# Altium PCB Jelly_Fish.PcbDoc
Units mil, origin at the board's own origin, x right, y up, seen from the top; angles counter-clockwise.
Board outline 1695 x 2770 mil, 2 copper layers (Top Layer, Bottom Layer); 18 components, 19 nets, 90 pads, 6 vias.
Unrouted connection lines stored in the file: 1.
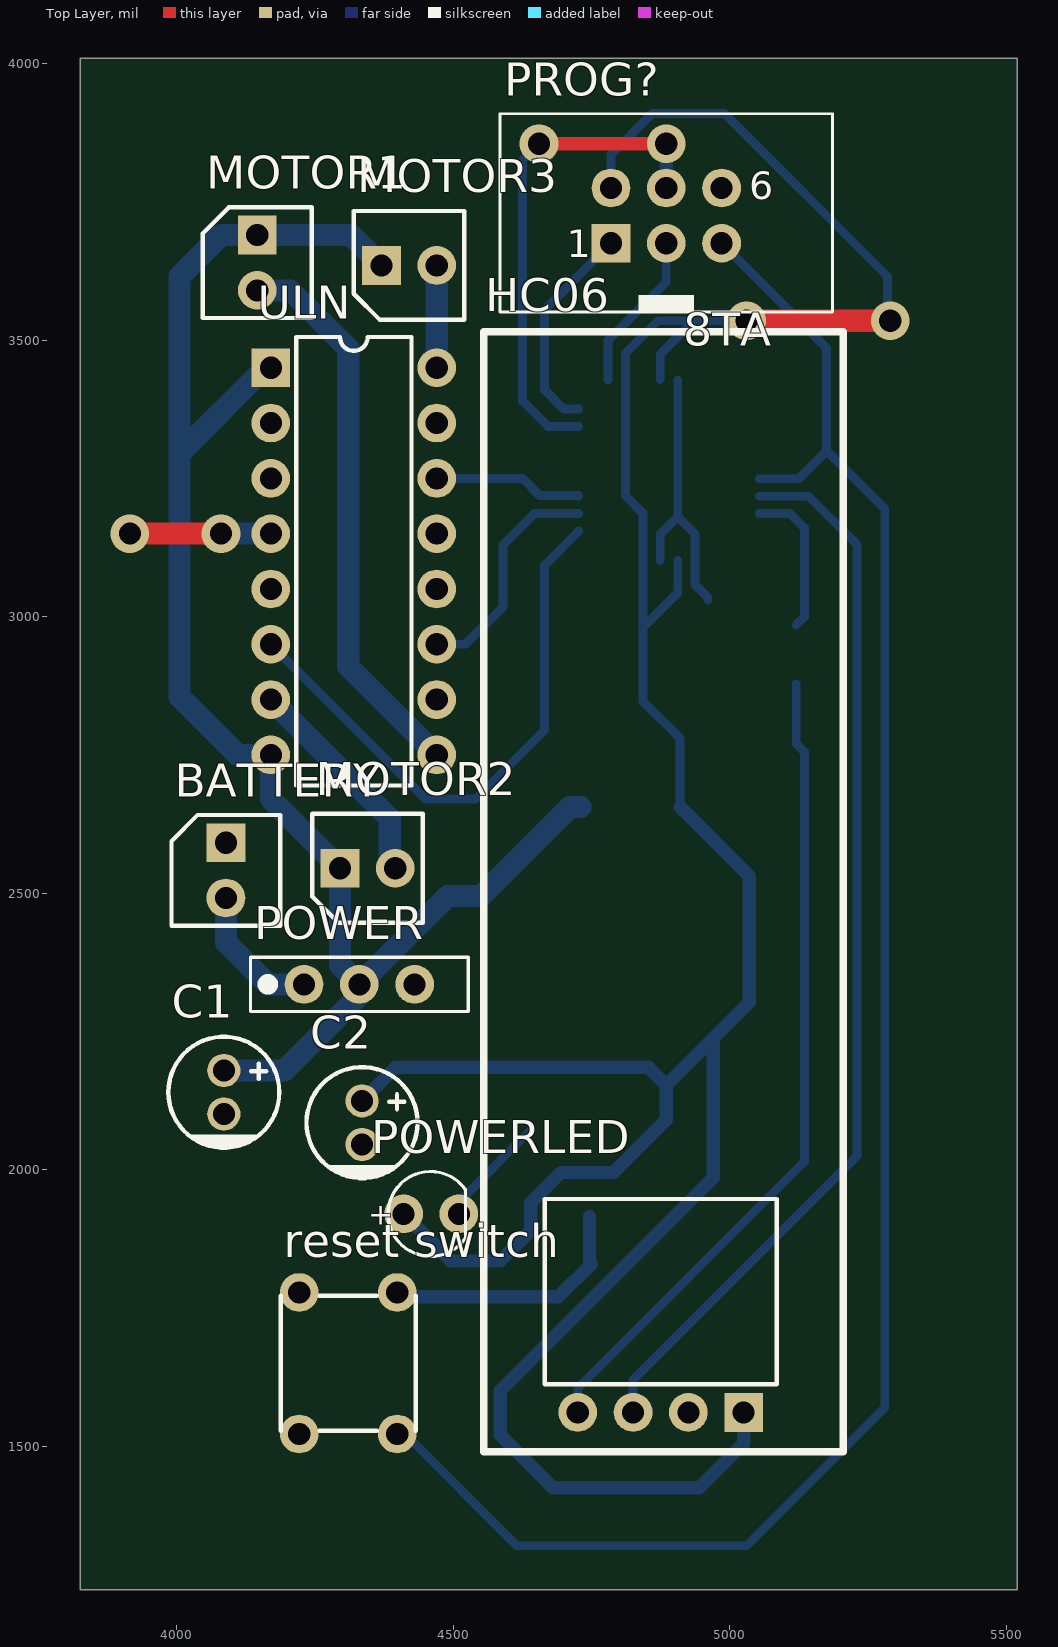
[diagram p0: Top Layer view]
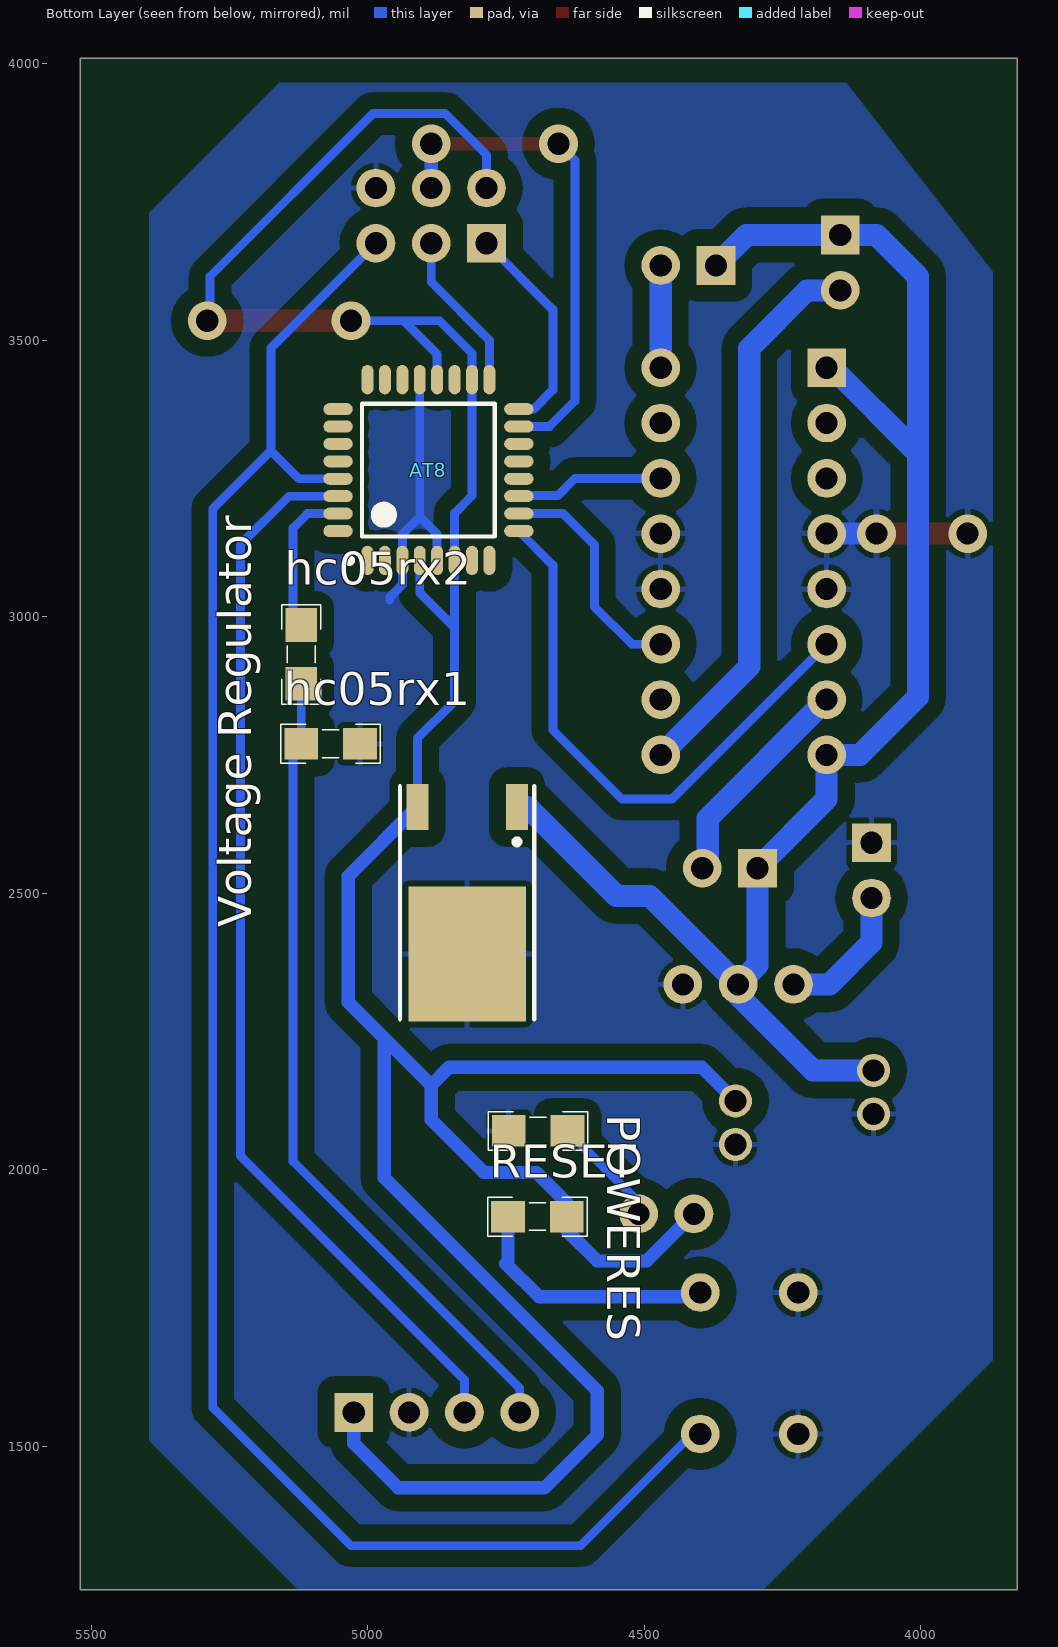
[diagram p1: Bottom Layer view, seen from below]
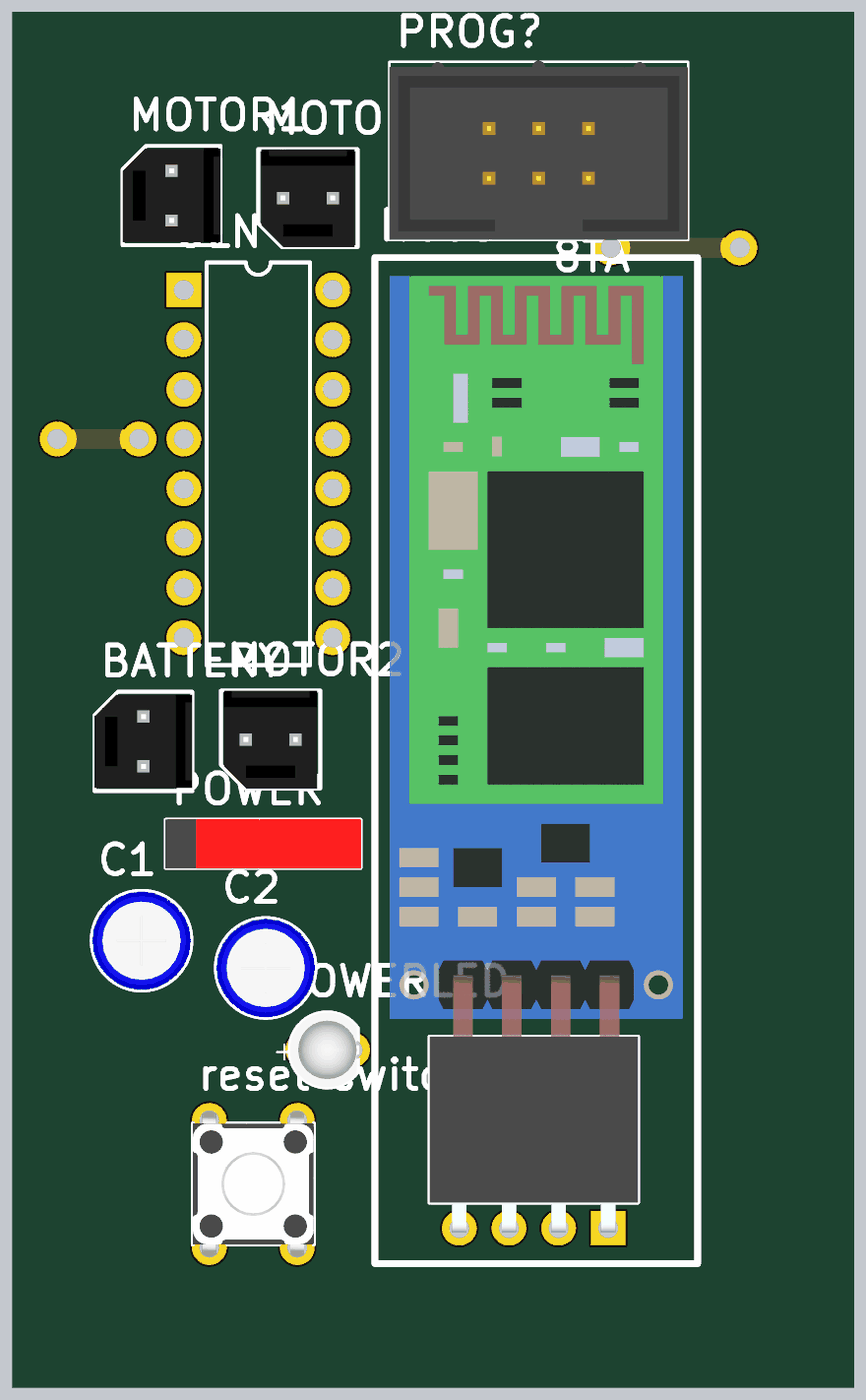
[diagram p2: 3D render of the assembled board from above, using the file's embedded part models]
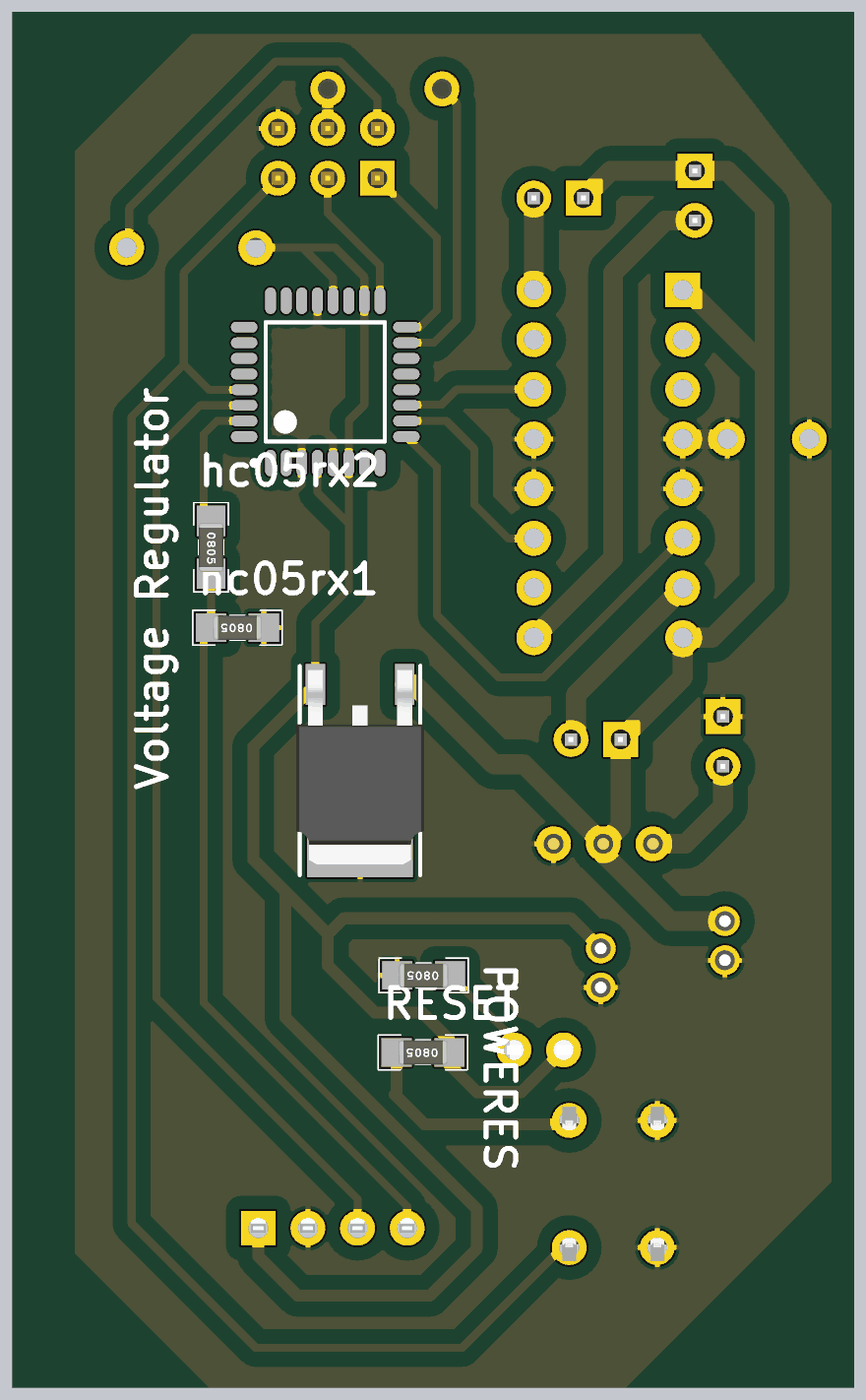
[diagram p3: 3D render of the assembled board from below, using the file's embedded part models]

## Layer stack, top to bottom
Top Solder: solder mask 0.4, Solder Resist, Dk 3.5
Top Layer: signal copper 1.4
Dielectric 1: dielectric 12.6, FR-4, Dk 4.8
Bottom Layer: signal copper 1.4
Bottom Solder: solder mask 0.4, Solder Resist, Dk 3.5

## Board outline
3825,1240 5520,1240 5520,4010 3825,4010

## Design rules (kind name [scope] priority, off if disabled: settings)
Clearance [All] p1: gap=10 ignorepadtopadclearanceinfootprint=TRUE except(0: Arc-Hole Track-Hole SMDPad-Hole THPad-Hole Via-Hole Fill-Hole Poly-Hole Region-Hole Text-Hole; 30: Arc-Fill Arc-Poly Arc-Region Track-Fill Track-Poly Track-Region SMDPad-Fill SMDPad-Poly SMDPad-Region THPad-Fill THPad-Poly THPad-Region Via-Fill Via-Poly Via-Region Fill-Fill Fill-Poly Fill-Region Poly-Poly Poly-Region Region-Region)
PolygonConnect [All] p1: connectstyle=Relief reliefconductorwidth=10 reliefentries=4 polygonreliefangle="90 Angle" airgapwidth=10
RoutingVias [All] p1: holewidth=28 width=50 viastyle="Through Hole" minholewidth=28 minwidth=50 maxholewidth=28 maxwidth=50
SolderMaskExpansion [All] p1: expansion=4
Width [All] p1: maxlimit=40 minlimit=16 preferedwidth=24
30 further rules are at their usual default settings.

## Components (designator, comment, footprint, x,y, rotation, side; value= is the part's Value field where it differs from the comment)
AT8 "ATmega8-16AI" 32A_L 4890,3265 r90 bottom
BATTERY "66100211622" 66100211622 4088.82,2541.18 r90 top
C1 "1uF" "cap 01" 4085,2140 r90 top
C2 "1uF" "cap 01" 4335,2085 r90 top
hc05rx1 "2k" RESC3413X04N 5066.85,2770 r0 bottom
hc05rx2 "1K" RESC3413X04N 5120,2931.85 r270 bottom
HC06 "Bluetooth HC06" "BLUETOOTH HC06_2" 4730,2565 r270 top
MOTOR1 "66100211622" 66100211622 4145.34,3640.01 r90 top
MOTOR2 "66100211622" 66100211622 4345,2545 r180 top
MOTOR3 "66100211622" 66100211622 4420,3635 r180 top
POWER "450301014042" 450301014042 4330,2335 r180 top
POWERES "1K" RESC3413X04N 4691.85,2070 r0 bottom
POWERLED "151031SS04000" "WL-TMRC_3 mm" 4460,1920 r0 top
PROG? "61200621621" 61200621621 4885,3725 r0 top
RESET "1K" RESC3413X04N 4693.15,1915 r0 bottom
"reset switch" "" 4301x60707x6_6x6x7 4310,1650 r270 top
ULN "ULN2064B" DIP16 4320,3100 r270 top
"Voltage Regulator" "L78M05" TO-252 4820,2522.87 r0 bottom

## Footprints (in the part's own frame and the unit in brackets; to place one, negate y for a bottom-side part, rotate by r counter-clockwise, add the part's x,y. Pads: shape width x height; smd on the part's side, far side on the other; paste and mask are expansions set on the pad)
32A_L [mm] "Thin QFP, 32-Leads, Body 7x7mm, Pitch 0.8mm, IPC High Density"
  oval 1.35x0.55 smd: 1(-4.15,2.8) 2(-4.15,2) 3(-4.15,1.2) 4(-4.15,0.4) 5(-4.15,-0.4) 6(-4.15,-1.2) 7(-4.15,-2) 8(-4.15,-2.8) 17(4.15,-2.8) 18(4.15,-2) 19(4.15,-1.2) 20(4.15,-0.4) 21(4.15,0.4) 22(4.15,1.2) 23(4.15,2) 24(4.15,2.8)
  oval 0.55x1.35 smd: 9(-2.8,-4.15) 10(-2,-4.15) 11(-1.2,-4.15) 12(-0.4,-4.15) 13(0.4,-4.15) 14(1.2,-4.15) 15(2,-4.15) 16(2.8,-4.15) 25(2.8,4.15) 26(2,4.15) 27(1.2,4.15) 28(0.4,4.15) 29(-0.4,4.15) 30(-1.2,4.15) 31(-2,4.15) 32(-2.8,4.15)
  silkscreen extent -4.27,-3.05 3.05,3.75, body extent -3.5,-3.5 3.5,3.5, height 1.2
4301x60707x6_6x6x7 [mil] "6x6mm Tact Switch, THT version"
  round 70 hole 40: 1(-127.95,88.58) 2(-127.95,-88.58) 3(127.95,88.58) 4(127.95,-88.58)
  silkscreen extent -122,-122 122,122, body extent -155,-122 155,122, height 278
61200621621 [mil] "6 pins, straight, gold plating"
  rect 70x70 hole 40: 1(-100,-50)
  round 70 hole 40: 2(-100,50) 3(0,-50) 4(0,50) 5(100,-50) 6(100,50)
  silkscreen extent -301,-174 301,184, body extent -301,-174 301,187, height 359
66100211622 [mil] "2.54 mm Intercom Male Horizontal Shrouded Header, 2p"
  rect 70x70 hole 40: 1(50,0)
  round 70 hole 40: 2(-50,0)
  silkscreen extent -100,-98 100,98, body extent -94,-98 94,98, height 443
450301014042 [mil] "10mm*2.5mm. SPDT, ON-ON, 2.54mm, horizontal type, THT, bulk"
  round 70 hole 40: 1(0,0) 2(-100,0) 3(100,0)
  silkscreen extent -197,-49 197,49, body extent -197,-49 197,49, height 254
"BLUETOOTH HC06_2" [mil]
  rect 70x70 hole 40: 1(1003.98,295)
  round 70 hole 40: 2(1003.98,195) 3(1003.98,95) 4(1003.98,-5)
  silkscreen extent -950,-175 1075,475, body extent -913,-145 1012,445, height 259
"cap 01" [mil]
  round 60 hole 40: 1(39.37,0) 2(-39.37,0)
  silkscreen extent -100,-100 100,100, body extent -99,-99 99,99, height 494
DIP16 [mil] "DIP; 16 Leads; Row Spacing 7.62 mm; Pitch 2.54 mm"
  rect 70x70 hole 40: 1(-350,-150)
  round 70 hole 40: 2(-250,-150) 3(-150,-150) 4(-50,-150) 5(50,-150) 6(150,-150) 7(250,-150) 8(350,-150) 9(350,150) 10(250,150) 11(150,150) 12(50,150) 13(-50,150) 14(-150,150) 15(-250,150) 16(-350,150)
  silkscreen extent -406,-104 406,104
RESC3413X04N [mm] "Chip Resistor, 2-Leads, Body 3/40x1/30mm, IPC Medium Density-Design:Abbas Basereh"
  rect 1.55x1.45 smd: 1(-1.35,0) 2(1.35,0)
  silkscreen extent -2.29,-0.89 2.29,0.89, body extent -1.25,-0.62 1.25,0.62, height 0.79
TO-252 [mm] "D-PAK/TO-252-AA; 3 Leads (1 Cropped); Body 10.1 (inc. leads) x 6.6 mm (LxW max)"
  rect 1x2.1 smd: 1(-2.285,-3.375) 3(2.285,-3.375)
  rect 5.4x6.2 smd: 4(0,3.375)
  silkscreen extent -3.08,-4.33 3.08,6.37, body extent -3.27,-4.11 3.27,5.83, height 2.39
"WL-TMRC_3 mm" [mil] "THT Mono-color Round Color LED"
  round 70 hole 40: 1(50,0) 2(-50,0)
  silkscreen extent -78,-77 62,77, body extent -76,-76 64,76, height 213

## Part data
AT8: "8-Bit AVR Microcontroller with 8K Bytes of In-System Programmable Flash Memory", Supplier Part Number 1=ATMEGA8-16AI-ND, Code_JEDEC=MS-026-ABA, ComponentLink1Description=Datasheet, ComponentLink1URL=http://www.atmel.com/dyn/resources/prod_documents/doc2486.pdf, ComponentLink2Description="Atmel.com Home", ComponentLink2URL=http://www.atmel.com, DatasheetVersion=2486H-AVR-09/02, LatestRevisionDate=16-Oct-2006, LatestRevisionNote="IPC-7351 Footprint Added.", PackageDescription="32-Lead, 7x7x1.0 mm Body, 0.8mm Lead Pitch, Thin Profile Plastic Quad Flat Package (TQFP)", PackageReference=32A, PackageVersion="revB, Oct-2001", Published=17-Sep-2003, Publisher="Altium Limited", Supplier 1=Digi-Key, Supplier 2=Mouser, Supplier Part Number 2=556-ATMEGA8-16AI
BATTERY MOTOR1 MOTOR2 MOTOR3: "WR-WTB 2.54 mm Intercom Male Horizontal Shrouded Header, 2p", ComponentLink1Description=Manufacturer, ComponentLink1URL=http://www.we-online.de, ComponentLink2Description=Datasheet, ComponentLink2URL=http://katalog.we-online.de/em/datasheet/6610XX11622.pdf, Part Number=66100211622, Pin Number=2, Pitch="2.54 mm", Published Date="June 2017", Publisher="Wurth Elektronik"
C1 C2: library part CAP_Polar, "Polar Capacitor", Voltage=16V, Company="SJ Libraries", ComponentLink1Description=Datasheet, ComponentLink2Description=Reference, Designer="Eng. Saeid Jorablo", HelpURL=http://s3.picofile.com/file/7443264187/Coming_Soon_logo.gif, Mounting Technology="Surface Mount\Through-Hole", Publisher="SJ Unlimited", Status=Unreleased
hc05rx1 hc05rx2 POWERES RESET: library part "RES 0805 0.125W", "RES 0805", Data=16-12-2016, Desc.="RES SMD 0805", Designer="Abbas Basereh"
POWER: "WS-SLTV 10x2.5 mm THT", ComponentLink1Description=Manufacturer, ComponentLink1URL=http://www.we-online.de, ComponentLink2Description=Datasheet, ComponentLink2URL=http://katalog.we-online.de/em/datasheet/450301014042.pdf, Part Number=450301014042, Published Date="June 2017", Publisher="Wurth Elektronik"
POWERLED: "WL-TMRC THT Mono-color Round Color, 3 mm, Super Red", Emitting Color="Super Red", Forward Voltage="2 V", ComponentLink1Description=Manufacturer, ComponentLink1URL=http://www.we-online.de, ComponentLink2Description=Datasheet, ComponentLink2URL=http://katalog.we-online.de/led/datasheet/151031SS04000.pdf, Luminous Intensity="160 mcd", Part Number=151031SS04000, Published Date="Jan 2017", Publisher="Wurth Elektronik", Size="3 mm", Viewing Angle=40°
PROG?: "WR-BHD 2.54mm Male Box Header", Manufacturer="Wurth Elektronik", ComponentLink1 Description=Manufacturer, ComponentLink1URL=http://www.we-online.com, ComponentLink2 Description=Datasheet, ComponentLink2URL=http://katalog.we-online.de/em/datasheet/6120xx21621.pdf, Created by="Baojun Chen", Created Date="March 2016", NoPins=6, partNo=61200621621
"reset switch": library part 430156070736, "WS-TATV 6x6mm Tact Switch, THT version", ComponentLink1Description=Manufacturer, ComponentLink1URL=http://www.we-online.de, ComponentLink2Description=Datasheet, ComponentLink2URL=http://katalog.we-online.de/em/datasheet/4301x6xxx7x6.pdf, Life Cycle="200000 cycles", Operation Force=360g, Part Number=430156070736, Published Date="June 2017", Publisher="Wurth Elektronik", Size="6x6x7 mm"
ULN: "50 V -1.5 A Quad Darlington Switch", ComponentLink1Description="Manufacturer Link", ComponentLink1URL=http://www.st.com/, ComponentLink2Description=Datasheet, ComponentLink2URL=http://www.st.com/stonline/products/literature/ds/1534/uln2064b.pdf, DatasheetVersion=Apr-1993, LatestRevisionDate=06-Jun-2005, LatestRevisionNote="Stylized 3D Model Added.", PackageDescription="DIP; 16 Leads; Row Spacing 7.62 mm; Pitch 2.54 mm", PackageReference=DIP16, PackageVersion=Apr-1996, Published=8-Jun-2000, Publisher="Altium Limited"
"Voltage Regulator": "Precision 500mA Regulator"
HC06: Telegram channel=@AltiumDesignerLearning

## Via types
v1: diameter 70, hole 40, Top Layer to Bottom Layer, 6 vias

## Nets (pads, with @x,y where several pads share a name; then routed paths per layer and width w, separated by ;. In a path a pad name is that pad's centre, name@x,y a point inside that pad or via, vN(x,y) a via of type N, cw(c..) or ccw(c..) an arc to the next point about the centre after c; other vN are vias at no path point)
5V: "Voltage Regulator.3" AT8.4 AT8.6 AT8.18 AT8.20 C2.1 HC06.1 POWERLED.2 PROG?.2 RESET.1 | length 5815.4
  Top Layer w40: v1(5030,3535) v1(5290,3535)
  Bottom Layer w16: PROG?.2 4785,3835 4860,3910 4990,3910 5285,3615 5285,3545 5275,3535 v1(5290,3535) ; AT8.20 4874.25,3474.25 4935,3535 ; AT8.4 4905.75,3042.99 4842.76,2980 ; 4909.96,2655.75 4909.96,2780.04 4842.76,2847.24 4842.76,2980 ; v1(5030,3535) 4935,3535 ; 4842.76,2980 AT8.6 4842.76,3187.24 4811.26,3218.74 AT8.18 4811.26,3476.26 4870,3535 4935,3535
  Bottom Layer w24: C2.1 4395.63,2185 4852.83,2185 4885,2152.83 ; POWERLED.2 4495,1835 4585,1835 4640,1890 RESET.1 4640,1940 4695,1995 4790,1995 4885,2090 4885,2152.83 ; 4909.96,2655.75 5035,2530.71 5035,2302.83 4970,2237.83 ; HC06.1 5025,1505 4945,1425 4680,1425 4585,1520 4585,1600 4970,1985 4970,2237.83 ; 4885,2152.83 4970,2237.83
12V: "Voltage Regulator.1" C1.1 MOTOR1.1 MOTOR2.1 MOTOR3.1 POWER.1 ULN.1 ULN.8 | length 2951.9
  Bottom Layer w40: C1.1 4194.37,2179.37 4330,2315 POWER.1 ; ULN.1 4160,3450 4005,3295 ; MOTOR3.1 4314.99,3690.01 MOTOR1.1 4080.01,3690.01 4005,3615 4005,3295 ; 4730.04,2655.75 4710.75,2655.75 4550,2495 4490,2495 POWER.1 ; 4005,3295 4005,2855 4110,2750 ULN.8 4170,2670 MOTOR2.1 4295,2370 POWER.1
GND: "reset switch.2" "reset switch.4" "Voltage Regulator.4" AT8.3 AT8.5 AT8.21 BATTERY.1 C1.2 C2.2 hc05rx1.1 HC06.2 POWER.2 POWERES.2 PROG?.6 ULN.4 ULN.5 ULN.12 ULN.13 | length 768
  Top Layer w40: v1(3915,3150) v1(4080,3150)
  Bottom Layer w16: AT8.5 4874.25,3149.25 4905.75,3180.75 ; AT8.21 4905.75,3180.75 ; 4960,3030 4960,3035 4937.24,3057.76 AT8.3 4937.24,3149.25 4905.75,3180.75
  Bottom Layer w40: v1(4080,3150) ULN.4
int: hc05rx1.2 hc05rx2.2 HC06.4 | length 1493.7
  Bottom Layer w16: HC06.4 4725,1605 5135,2015 5135,2755 hc05rx1.2 hc05rx2.2
LIPO: BATTERY.2 POWER.3 | length 252.7
  Bottom Layer w40: BATTERY.2 4088.82,2411.18 4165,2335 POWER.3
M1b: AT8.10 ULN.11 | length 420
  Bottom Layer w16: ULN.11 4521.85,2950 4590,3018.15 4590,3130 4646.26,3186.26 AT8.10
M1c: MOTOR1.2 ULN.9 | length 1009.4
  Bottom Layer w40: MOTOR1.2 4204.99,3590.01 4310,3485 4310,2910 ULN.9
M2b: AT8.9 ULN.6 | length 1048
  Bottom Layer w16: ULN.6 4450,2670 4540,2670 4665,2795 4665,3093.15 AT8.9
M2c: MOTOR2.2 ULN.7 | length 398.2
  Bottom Layer w40: ULN.7 4385,2635 4385,2555 MOTOR2.2
M3b: AT8.11 ULN.14 | length 270
  Bottom Layer w16: ULN.14 4625,3250 4656.24,3218.76 4725.61,3218.76 AT8.11
M3c: MOTOR3.2 ULN.16 | length 185
  Bottom Layer w40: ULN.16 MOTOR3.2
MISO: AT8.16 PROG?.1 | length 390.7
  Bottom Layer w16: AT8.16 4699.76,3375.24 4665,3410 4665,3555 PROG?.1
MOSI: AT8.15 PROG?.4 | length 908.2
  Top Layer w24: v1(4655,3855) v1(4885,3855)
  Bottom Layer w16: v1(4655,3855) 4625,3825 4625,3390 4671.26,3343.74 AT8.15
  Bottom Layer w24: PROG?.4 v1(4885,3855)
NetPOWERES_1: POWERES.1 POWERLED.1 | length 203.3
  Bottom Layer w16: POWERLED.1 4510,1941.3 POWERES.1
NetRESET_2: "reset switch.1" RESET.2 | length 466.1
  Bottom Layer w16: 4398.58,1777.95 4406.54,1770
  Bottom Layer w24: 4406.54,1770 4690,1770 4750,1830 4746.3,1833.7 RESET.2
RST: "reset switch.3" AT8.29 PROG?.5 | length 3438.5
  Bottom Layer w16: 4398.58,1522.05 4412.95,1522.05 4615,1320 5030,1320 5280,1570 5280,3195 5175,3300 ; PROG?.5 5175,3485 5175,3300 ; AT8.29 5124.25,3249.25 5175,3300
RX: AT8.31 hc05rx2.1 | length 273.7
  Bottom Layer w16: AT8.31 5108.74,3186.26 5135,3160 5135,3000 hc05rx2.1
SCK: AT8.17 PROG?.3 | length 290.2
  Bottom Layer w16: AT8.17 4779.76,3499.76 4885,3605 PROG?.3
TX: AT8.30 HC06.3 | length 1949.7
  Bottom Layer w16: HC06.3 4825,1620 5230,2025 5230,3130 5142.24,3217.76 AT8.30
pads on no net: AT8.1 AT8.2 AT8.7 AT8.8 AT8.12 AT8.13 AT8.14 AT8.19 AT8.22 AT8.23 AT8.24 AT8.25 AT8.26 AT8.27 AT8.28 AT8.32 ULN.2 ULN.3 ULN.10 ULN.15

## Polygon pours and split planes (outlines as drawn)
GND on Bottom Layer "GND" (solid, remove dead copper, pour order 0): 4134.52,3965 5160,3965 5395,3730 5395,1510 5125,1240 4285,1240 3870,1655 3870,3623.33

## Text inside footprints (layer, text, board x,y; h text height)
POWERLED: Top Overlay "+" at 4345.83,1900.32 h39.37
PROG?: Top Overlay "6" at 5035,3755 h50; Top Overlay "1" at 4705,3650 h50